# Altium PCB PWM_change.PcbDoc
Units mil, origin at the board's own origin, x right, y up, seen from the top; angles counter-clockwise.
Board outline 3937.01 x 3937.01 mil, 2 copper layers (Top Layer, Bottom Layer); 54 components, 43 nets, 159 pads, 8 vias.
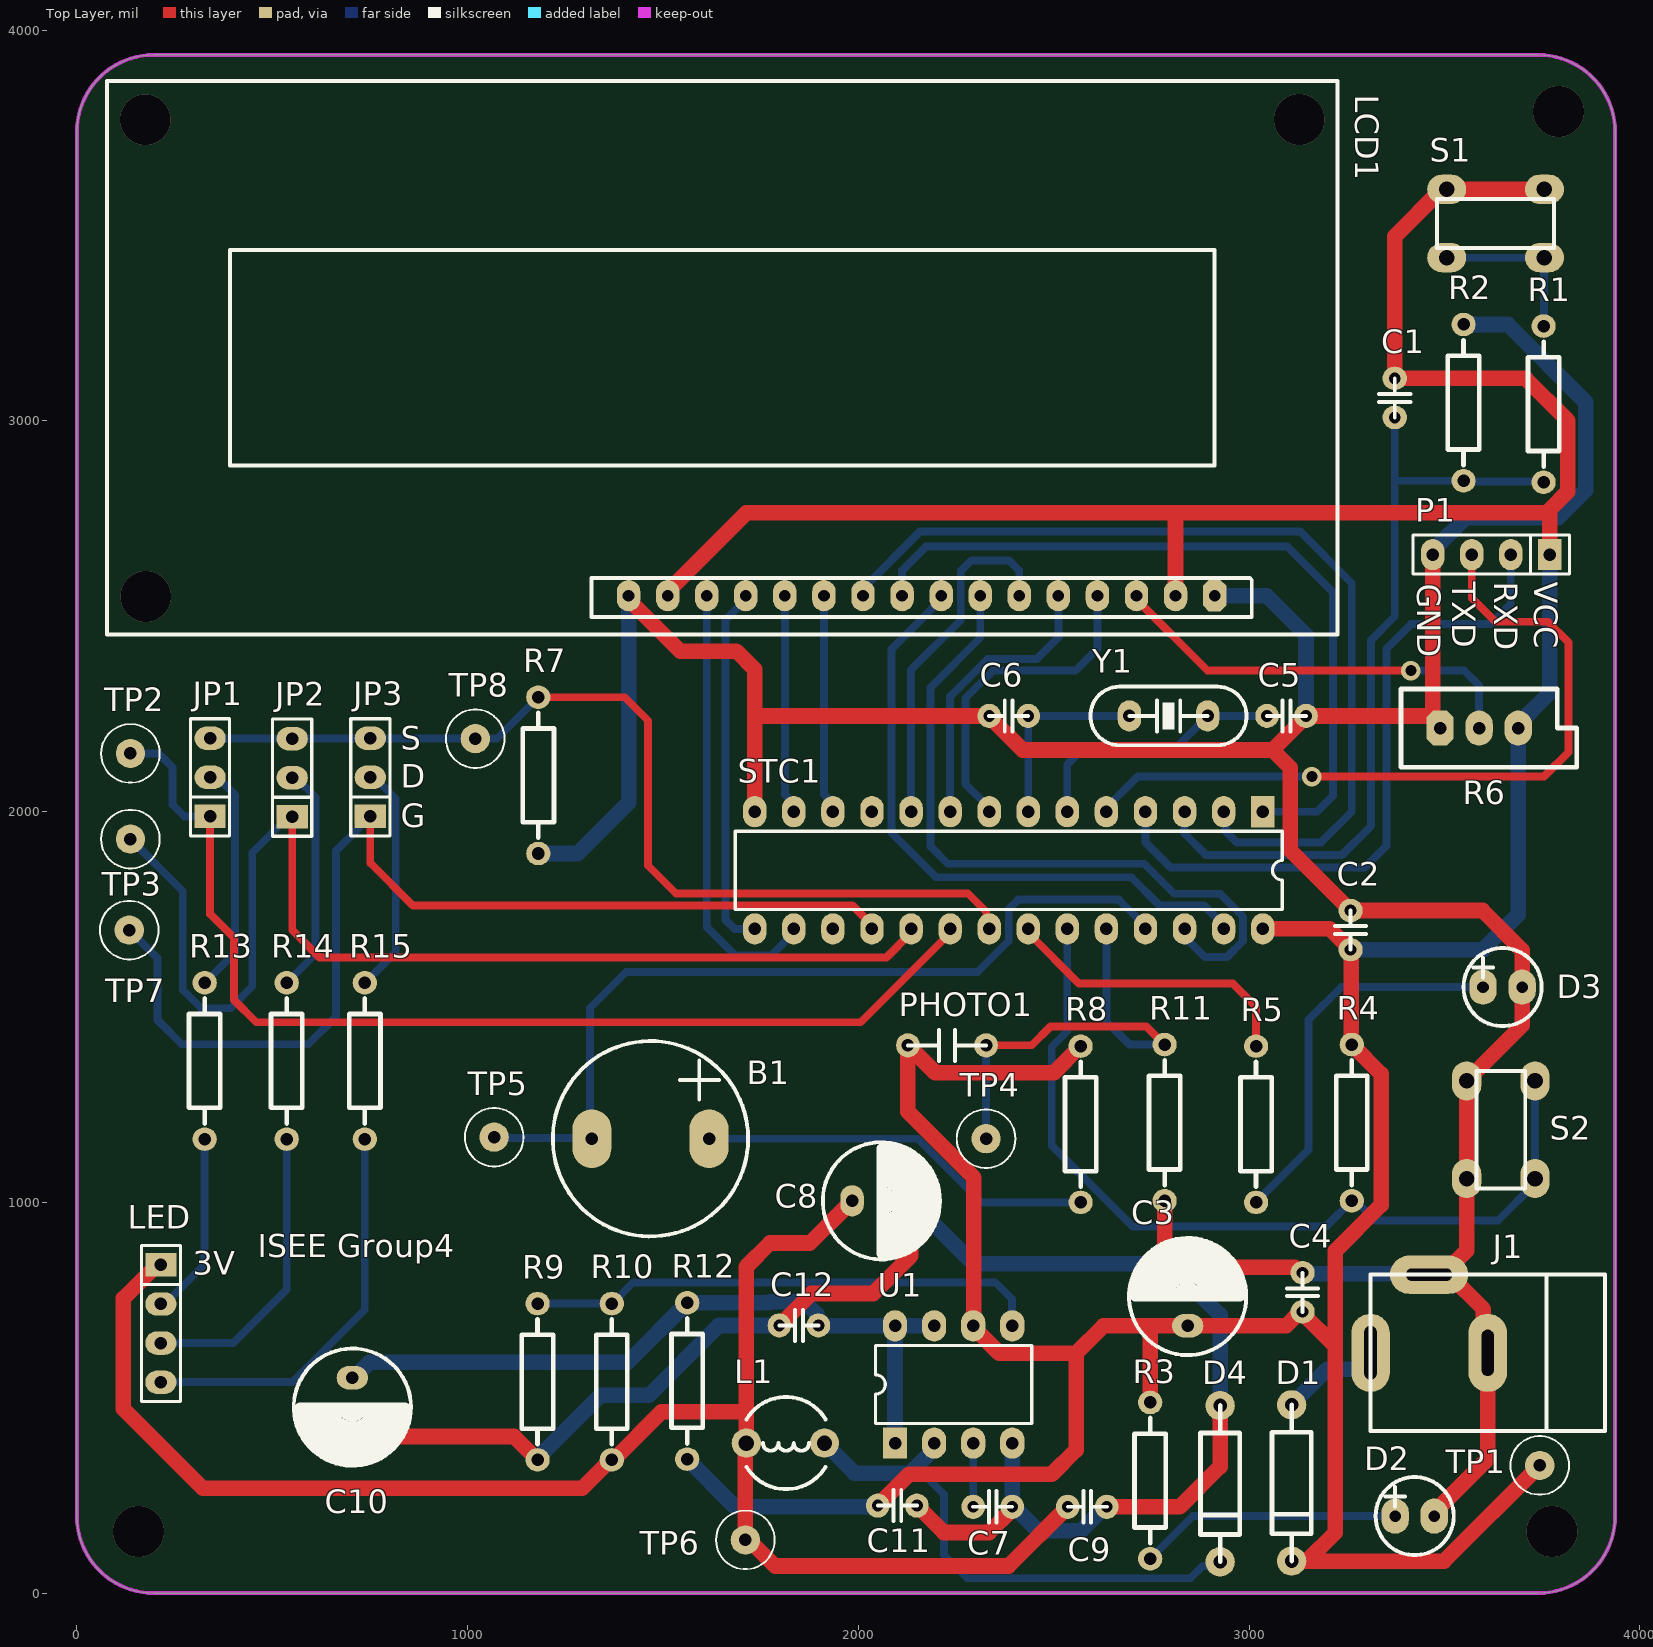
[diagram p0: Top Layer view]
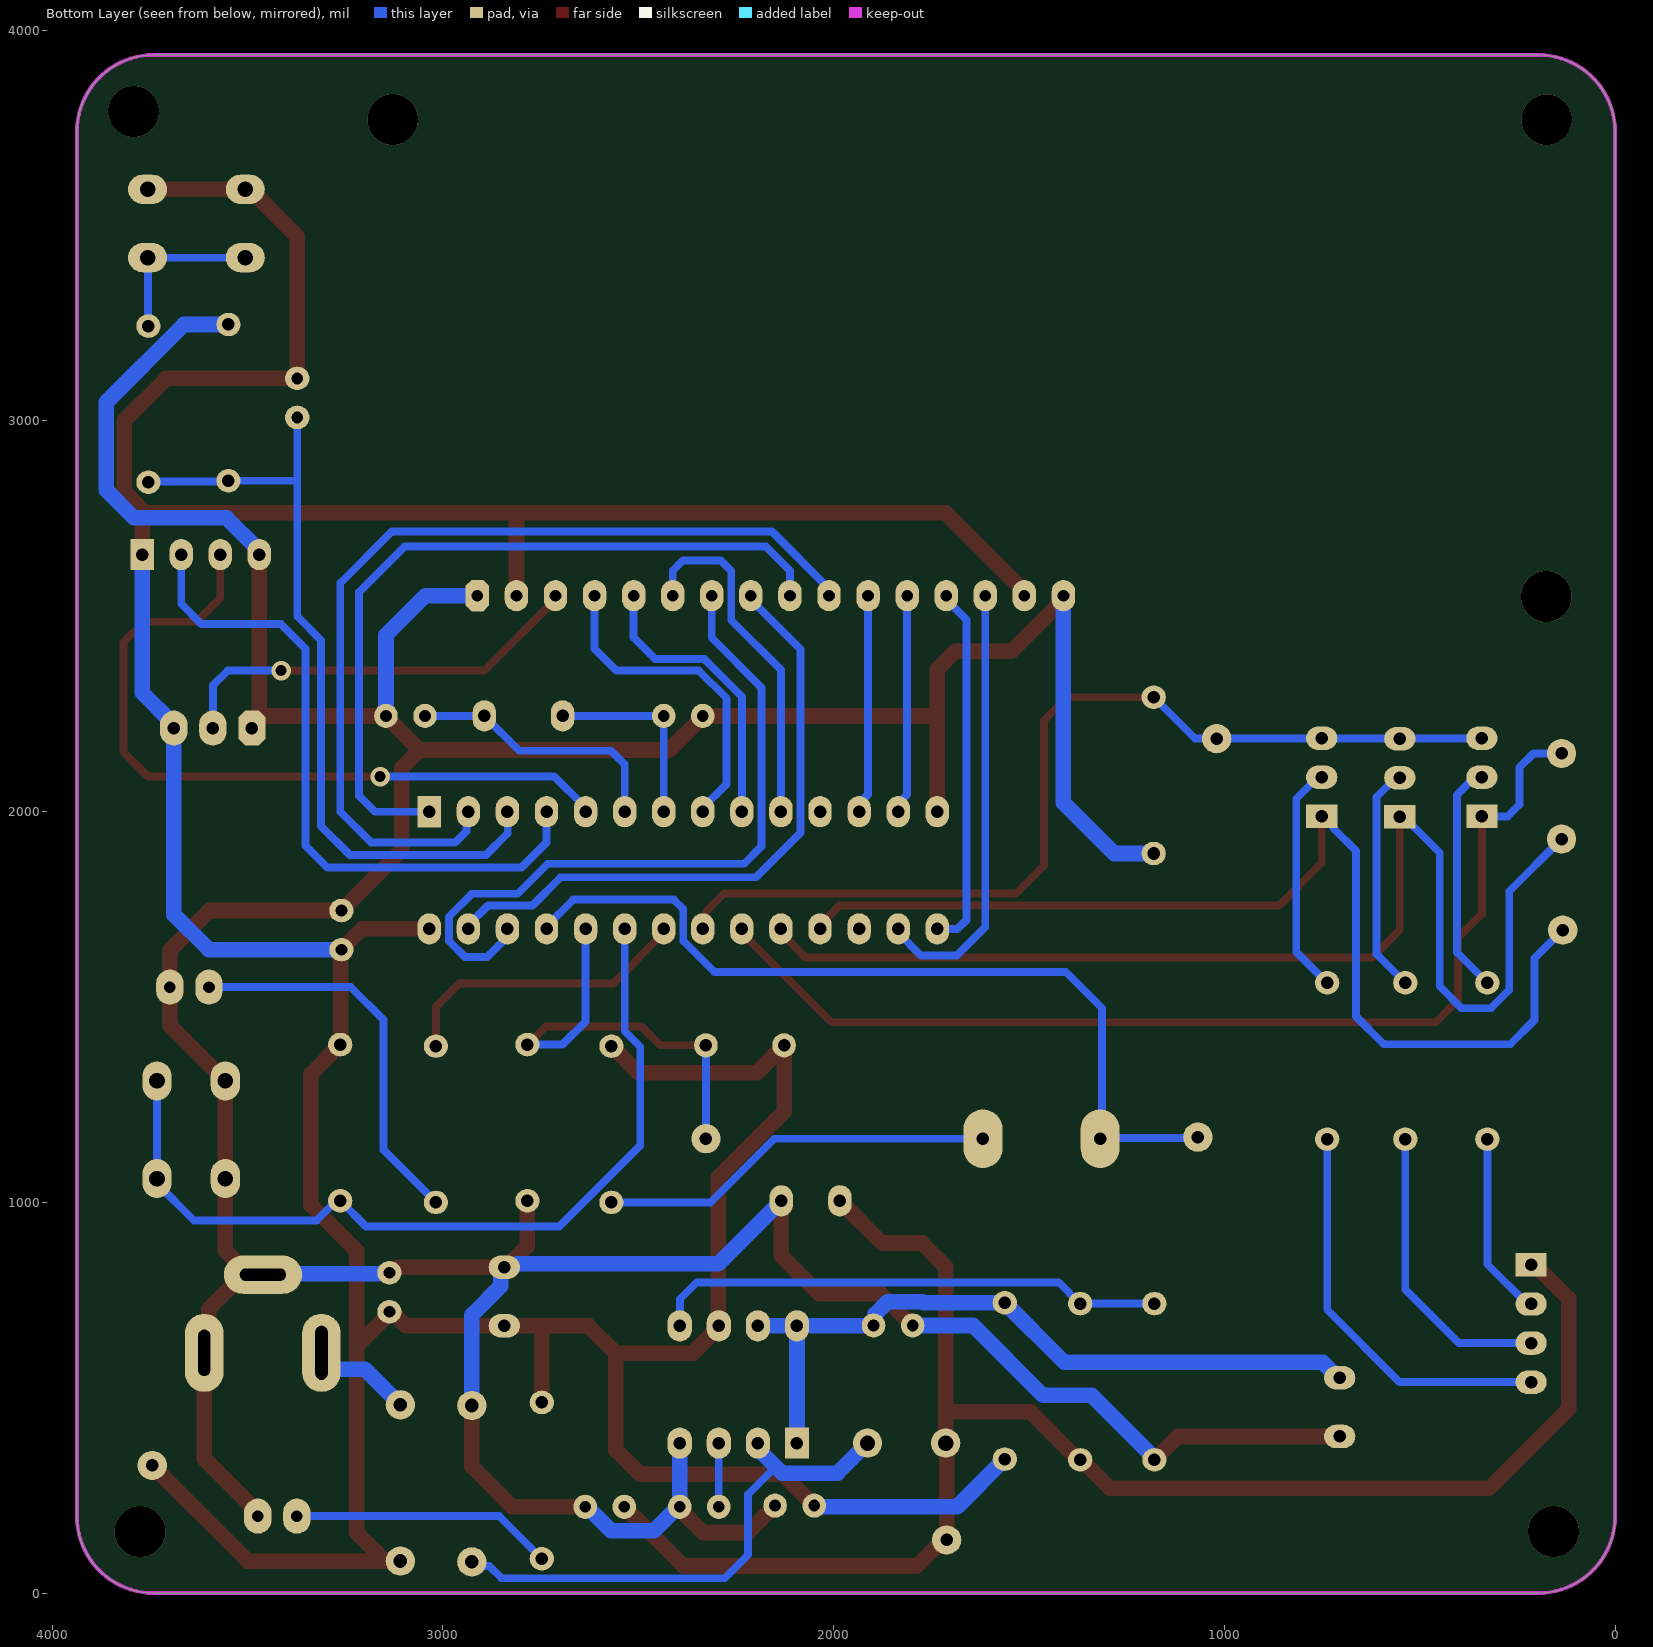
[diagram p1: Bottom Layer view, seen from below]

## Layer stack, top to bottom
Top Solder: solder mask 0.4, Solder Resist, Dk 3.5
Top Layer: signal copper 1.4
Dielectric 1: dielectric 12.6, FR-4, Dk 4.8
Bottom Layer: signal copper 1.4
Bottom Solder: solder mask 0.4, Solder Resist, Dk 3.5

## Board outline
0,196.85 ccw(c196.85,196.85) 196.85,0 3740.16,0 ccw(c3740.16,196.85) 3937.01,196.85 3937.01,3740.16 ccw(c3740.16,3740.16) 3740.16,3937.01 196.85,3937.01 ccw(c196.85,3740.16) 0,3740.16

## Design rules (kind name [scope] priority, off if disabled: settings)
Clearance [All] p1: gap=10 ignorepadtopadclearanceinfootprint=FALSE except(0: Arc-Hole Track-Hole SMDPad-Hole THPad-Hole Via-Hole Fill-Hole Poly-Hole Region-Hole Text-Hole)
PolygonConnect [All] p1: connectstyle=Relief reliefconductorwidth=10 reliefentries=4 polygonreliefangle="90 Angle" airgapwidth=10
RoutingVias [All] p1: holewidth=28 width=50 viastyle="Through Hole" minholewidth=28 minwidth=50 maxholewidth=28 maxwidth=50
SolderMaskExpansion [All] p1: expansion=4 istentingtop=FALSE
Width [All] p1: maxlimit=40 minlimit=20 preferedwidth=40 minimp=50.000000 maximp=50.000000 favimp=50.000000
30 further rules are at their usual default settings.

## Components (designator, comment, footprint, x,y, rotation, side; value= is the part's Value field where it differs from the comment)
B1 "BELL" BELL 1468,1163 r0 top
C1 "10uF" C1 3373,3109 r270 top
C2 "0.1uF" C1 3260,1747 r270 top value=0.1u
C3 "470uF" RB.15/.3 2843,684 r90 top
C4 "104u" C1 3137,820 r270 top value=104
C5 "47pF" C1 3046,2245 r0 top value=30p
C6 "47pF" C1 2434.84,2245 r180 top value=30p
C7 "471" C1 2394,221 r180 top
C8 "330uF" RB.15/.3 1984,1004 r0 top
C9 "104" C1 2536,221 r0 top
C10 "47uF" RB.15/.3 705,551 r270 top
C11 "104" C1 2050,224 r0 top
C12 "104" C1 1898,685 r180 top
D1 "1N4007" DIODE0.4 3109,482 r270 top
D2 "LED1" LED--5 3374,197 r0 top
D3 "LED1" LED--5 3599,1551 r0 top
D4 "1N5819" DIODE0.4 2926,480 r270 top
J1 "电源插座5.4mm" DC-005 3311,615 r0 top
JP1 "RED" SIP3 341,1988 r90 top
JP2 "GREEN" SIP3 551,1987 r90 top
JP3 "BLUE" SIP3 751,1988 r90 top
L1 "220uH" L-4*15 1815,384 r180 top
LCD1 "LCD1602" lcd1602 1652.16,3161.66 r180 top
LED "LED" SIP4 215,840 r270 top (schematic designator JP4)
P1 "HEADER 4" SIP4 3770,2658 r180 top
PHOTO1 "PHOTO" C2 2327,1402 r180 top
R1 "1.5K" AXIAL0.4 3754,3243 r270 top
R2 "10K" AXIAL0.4 3549,2847 r90 top
R3 "1K" AXIAL0.4 2747,88 r90 top value=10K
R4 "10K" AXIAL0.4 3263,1004 r90 top value=1K
R5 "1K" AXIAL0.4 3018,1000 r90 top value=10K
R6 "10K" VR5 3489,2214 r0 top
R7 "0.5R" AXIAL0.4 1181,1893 r90 top
R8 "100R" AXIAL0.4 2569,1000 r90 top
R9 "2K" AXIAL0.4 1179,341 r90 top
R10 "2.8K" AXIAL0.4 1369,341 r90 top
R11 "47K" AXIAL0.4 2784,1004 r90 top
R12 "0.51R" AXIAL0.4 1562,343 r90 top
R13 "100R" AXIAL0.4 327,1562 r270 top
R14 "100R" AXIAL0.4 537,1562 r270 top
R15 "100R" AXIAL0.4 737,1562 r270 top
S1 "SW-PB" SWPB1 3756,3418 r0 top
S2 "SW-PB" SWPB1 3732,1311 r90 top
STC1 "STC12C5616AD" DIP28S 3035,2000 r270 top
TP1 "TP-1" TP-1-1 3744.09,326.77 r0 top
TP2 "TP-1" TP-1-1 137,2149 r0 top
TP3 "TP-1" TP-1-1 137,1930 r0 top
TP4 "TP-1" TP-1-1 2327,1163 r0 top
TP5 "TP-1" TP-1-1 1068,1167 r0 top
TP6 "TP-1" TP-1-1 1711,136 r0 top
TP7 "TP-1" TP-1-1 134,1697 r0 top
TP8 "TP-1" TP-1-1 1019.68,2187 r0 top
U1 "MC34063" DIP8 2094,384 r90 top
Y1 "11.0592MHz" CY2 2694,2245 r0 top

## Footprints (in the part's own frame and the unit in brackets; to place one, negate y for a bottom-side part, rotate by r counter-clockwise, add the part's x,y. Pads: shape width x height; smd on the part's side, far side on the other; paste and mask are expansions set on the pad)
AXIAL0.4 [mil]
  oval 60x62 hole 32: 1(0,0) 2(400,0)
  silkscreen extent 40,-40 360,40, body extent -11,-50 413,49, height 128
BELL [mil]
  oval 100x150 hole 32: 1(150,0) 2(-150,0)
  silkscreen extent -250,-250 250,250
C1 [mil]
  oval 60x62 hole 30: 1(0,0) 2(100,0)
  silkscreen extent 0,-40 100,40
C2 [mil]
  oval 60x62 hole 32: 1(0,0) 2(200,0)
  silkscreen extent 0,-40 200,40
CY2 [mil]
  oval 60x80 hole 32: 1(0,0) 2(200,0)
  silkscreen extent -100,-75 300,75
DC-005 [mm]
  oval 2.5x5.08 hole 0.8 slot 3.5 at 90 deg: 1(0,0)
  oval 2.5x5.08 hole 0.8 slot 3 at 90 deg: 2(7.62,0)
  oval 5.08x2.5 hole 0.8 slot 3 at 0 deg: 3(3.81,5.08)
  silkscreen extent 0,-5.08 15.24,5.08, body extent 0.12,-4.4 15.32,5, height 11
DIODE0.4 [mil]
  round 75 hole 35: A(0,0) K(400,0)
  silkscreen extent 0,-50 400,50, body extent -18,-50 418,52, height 130
DIP8 [mil]
  rect 80x62 hole 32: 1(0,0)
  oval 80x62 hole 32: 2(0,-100) 3(0,-200) 4(0,-300) 5(300,-300) 6(300,-200) 7(300,-100) 8(300,0)
  silkscreen extent 50,-350 250,50
DIP28S [mil]
  rect 80x60 hole 32: 1(0,0)
  oval 80x60 hole 32: 2(0,-100) 3(0,-200) 4(0,-300) 5(0,-400) 6(0,-500) 7(0,-600) 8(0,-700) 9(0,-800) 10(0,-900) 11(0,-1000) 12(0,-1100) 13(0,-1200) 14(0,-1300) 15(300,-1300) 16(300,-1200) 17(300,-1100) 18(300,-1000) 19(300,-900) 20(300,-800) 21(300,-700) 22(300,-600) 23(300,-500) 24(300,-400) 25(300,-300) 26(300,-200) 27(300,-100) 28(300,0)
  silkscreen extent 50,-1350 250,50
L-4*15 [mm]
  round 1.905 hole 1: 1(-2.5,0) 2(2.58,0)
  silkscreen extent -2.57,-3 2.57,3
lcd1602 [mil]
  oct 60x80 hole 30: 1(-1259.84,608.66)
  oval 60x80 hole 30: 2(-1159.84,608.66) 3(-1059.84,608.66) 4(-959.84,608.66) 5(-859.84,608.66) 6(-759.84,608.66) 7(-659.84,608.66) 8(-559.84,608.66) 9(-459.84,608.66) 10(-359.84,608.66) 11(-259.84,608.66) 12(-159.84,608.66) 13(-59.84,608.66) 14(40.16,608.66) 15(140.16,608.66) 16(240.16,608.66)
  silkscreen extent -1575,-709 1575,709
LED--5 [mil]
  oval 70x90 hole 30: A(0,0) K(100,0)
  silkscreen extent -50,-100 150,100
RB.15/.3 [mil]
  oval 60x80 hole 32: 1(0,0) 2(150,0)
  silkscreen extent -75,-150 225,150
SIP3 [mil]
  rect 60x80 hole 32: 1(0,0)
  oval 60x80 hole 32: 2(100,0) 3(200,0)
  silkscreen extent -50,-50 250,50, body extent -50,-50 250,50, height 336
SIP4 [mil]
  rect 60x80 hole 32: 1(0,0)
  oval 60x80 hole 32: 2(100,0) 3(200,0) 4(300,0)
  silkscreen extent -50,-50 350,50, body extent -50,-50 350,50, height 336
SWPB1 [mil]
  oval 100x75 hole 40: 1(-250,0) 1(0,0) 2(-250,175) 2(0,175)
  silkscreen extent -275,25 25,150
TP-1-1 [mil]
  round 75 hole 32: 1(0,0)
  silkscreen extent -75,-75 75,75
VR5 [mil]
  oct 70x90 hole 32: 1(0,0)
  oval 70x90 hole 32: 2(200,0) W(100,0)
  silkscreen extent -100,-100 350,100

## Part data
C1 C7 C9 C11 C12: library part CAP
C2 C4 C5 C6: library part Cap, "Capacitor", LatestRevisionDate=17-Jul-2002, LatestRevisionNote="Re-released for DXP Platform.", PackageReference=RAD-0.3, Published=8-Jun-2000, Publisher="Altium Limited"
C3: library part CD, "电解电容", =470u
C8 C10: library part ELECTRO2
D1: library part D1
D2 D3: "Typical RED GaAs LED", LatestRevisionDate=08-Jul-2005, LatestRevisionNote="Mech Layer 1 removed.", PackageReference=LED-1, Published=8-Jun-2000, Publisher="Altium Limited"
D4: library part DIODE
JP1 JP2 JP3: library part "HEADER 3"
L1: library part INDUCTOR
LED: library part "HEADER 4"
P1: "4 Pin Header"
R1 R2: library part RES2
R3 R4 R5: library part Res2, "Resistor", LatestRevisionDate=17-Jul-2002, LatestRevisionNote="Re-released for DXP Platform.", PackageReference=AXIAL-0.4, Published=8-Jun-2000, Publisher="Altium Limited"
R6: library part POT1
R7 R8 R9 R10 R11 R12 R13 R14 R15: library part RES1
STC1: library part STC12C5410-35C-PSOP28
Y1: library part XTAL, "Crystal Oscillator", LatestRevisionDate=17-Jul-2002, LatestRevisionNote="Re-released for DXP Platform.", PackageReference=R38, Published=8-Jun-2000, Publisher="Altium Limited"

## Via types
v1: diameter 130, hole 130, Top Layer to Bottom Layer, 6 vias
v2: diameter 50, hole 28, Top Layer to Bottom Layer, 2 vias

## Nets (pads, with @x,y where several pads share a name; then routed paths per layer and width w, separated by ;. In a path a pad name is that pad's centre, name@x,y a point inside that pad or via, vN(x,y) a via of type N, cw(c..) or ccw(c..) an arc to the next point about the centre after c; other vN are vias at no path point)
3V: C8.1 C9.1 L1.2 LED.1 R10.1 TP6.1 | length 4132.8
  Top Layer w40: LED.1 205,840 119,754 119,471.55 322.55,268 1293,268 1366,341 R10.1 1373.28,341 1496.28,464 1713.43,464 ; C8.1 1984,999.41 1974.76,990.17 1970.17,990.17 1876,896 1774,896 1713.43,835.43 1713.43,464 ; C9.1 2384.48,69.48 1786.99,69.48 1720.47,136 TP6.1 1711,381.57 L1.2 1713.43,464
BEEP: B1.2 STC1.25 TP5.1 | length 2205.1
  Bottom Layer w20: TP5.1 1070,1165 B1.2@1316,1165 ; B1.2 B1.2@1316,1165 ; STC1.25 2735,1707 2667,1775 2409,1775 2385,1751 2385,1669.29 2305.71,1590 1406,1590 1313,1497 1313,1168 B1.2@1316,1165
BLUE: JP3.2 R15.1 | length 588.6
  Bottom Layer w20: R15.1@737,1569 744,1569 816,1641 816,2033 761,2088 JP3.2
check: JP1.3 JP2.3 JP3.3 R7.2 STC1.21 TP8.1 | length 2523.2
  Top Layer w20: R7.2 1402,2293 1462,2233 1462,1862 1533,1791 2280,1791 2327.35,1743.65 2327.35,1707.65 STC1.21
  Bottom Layer w20: JP1.3 341.5,2187.5 550.5,2187.5 JP2.3 551.5,2187.5 750.5,2187.5 JP3.3 751.5,2187.5 951.5,2187.5 952,2187 1075,2187 R7.2
"E     P34": LCD1.6 STC1.10 | length 904.6
  Bottom Layer w20: STC1.10 2135,2363 2262,2490 2262,2616 2289,2643 2386,2643 2412,2617 LCD1.6
GND: C2.1 C3.2 C4.1 C5.2 C6.2 C7.1 C8.2 C9.2 C10.2 C11.2 C12.2 D2.K D3.K D4.A J1.2 J1.3 LCD1.1 LCD1.16 P1.4 R2.2 R6.1 R7.1 R9.1 R11.1 S2.2 STC1.14 U1.4 | length 13161.1
  Top Layer w40: C10.2 1119,401 R9.1 ; LCD1.16 1412,2543 1544,2411 1688,2411 1735,2364 1735,2242 ; STC1.14 1735,2242 ; C12.2 1880,767 2038,767 2134,863 C8.2 ; C11.2 2219,155 2334.41,155 2394,214.59 C7.1 ; C9.2 2823,221 2926,324 D4.A ; R11.1 2784,888.41 2838.41,834 C3.2 3116.59,834 3130.59,820 C4.1 ; J1.3 J1.3@3495.98,815 ; P1.4 3470,2248.78 3489,2229.78 R6.1@3489,2218.22 ; D2.K 3474,207 3611,344 J1.2 3599.82,626.18 3599.82,726.97 3511.79,815 J1.3@3495.98,815 ; R6.1 R6.1@3489,2218.22 ; 1735,2242 1738,2245 C6.2 2334.84,2244 2420.84,2158 3060,2158 ; 3060,2158 3106,2112 3106,1901 C2.1 3597.5,1747 3699,1645.5 D3.K 3699,1453 3576.2,1330.2 3573.17,1330.2 3557,1314.03 3557,1311 3557,1061 3557,876.02 J1.3@3495.98,815 ; 3060,2158 3146,2244 C5.2 3462.22,2245 R6.1@3489,2218.22
  Bottom Layer w40: R9.1 1179,345.41 1339.59,506 1464,506 1643,685 C12.2 ; R7.1 1282,1893 1412,2023 LCD1.16 ; C8.2 2134,999.41 2143.24,990.17 2147.83,990.17 2295.48,842.52 2810.34,842.52 2815.03,837.83 2839.17,837.83 C3.2 ; U1.4 C7.1 2398.41,221 2459.41,160 2570.59,160 2631.59,221 C9.2 ; C3.2@2845.23,836.23 2852.04,829.41 2852.04,785.76 2926,711.8 D4.A ; LCD1.1 3045,2553 3146,2452 C5.2 ; C4.1 3139.5,817.5 3458.5,817.5 J1.3 ; P1.4 3476.53,2664.53 3476.53,2674.53 3554,2752 3791,2752 3862,2823 3862,3048 3663,3247 R2.2
GREEN: JP2.2 R14.1 | length 586.4
  Bottom Layer w20: R14.1 611,1636 611,2037 561,2087 JP2.2
light_AD: PHOTO1.1 R11.2 STC1.24 TP4.1 | length 1145.4
  Top Layer w20: PHOTO1.1 2444.09,1402 2492.09,1450 2737,1450 2783,1404 R11.2
  Bottom Layer w20: TP4.1 PHOTO1.1 ; STC1.24 2635,1463 2694,1404 R11.2
NetB1_1: B1.1 R8.1 | length 1018.5
  Bottom Layer w20: B1.1 2152,1163 2315,1000 R8.1
NetC1_2: C1.2 R1.2 R2.1 STC1.3 | length 2042.5
  Bottom Layer w20: STC1.3 2834.43,1999.43 2834.43,1944.57 2890,1889 3238,1889 3312,1963 3312,2439 3373,2500 3373,2843 ; C1.2 3373,2843 ; R1.2 3752,2845 3551,2845 R2.1 3377,2847 3373,2843
NetC5_1: C5.1 STC1.6 Y1.2 | length 683.4
  Bottom Layer w20: STC1.6 2535,2121 2570,2156 2805,2156 Y1.2 C5.1
NetC6_1: C6.1 STC1.7 Y1.1 | length 504.2
  Bottom Layer w20: STC1.7 2434.92,2000.08 2434.92,2244.92 C6.1 Y1.1
NetC7_2: C7.2 U1.3 | length 163
  Bottom Layer w20: C7.2 U1.3
NetC10_1: C10.1 C12.1 R12.2 U1.1 U1.7 U1.8 | length 1910.3
  Bottom Layer w20: C12.1 C12.1@1898.5,684.5 ; U1.8@2093.5,684.5 U1.8
  Bottom Layer w40: C10.1 709.59,551 725,566.41 725,567.12 748.43,590.55 1409.55,590.55 R12.2 1770.15,743 1773.15,746 1861.57,746 1894.17,713.4 1894.17,688.83 C12.1 ; C12.1@1898.5,684.5 U1.8@2093.5,684.5 ; U1.1 U1.8 U1.7
NetD1_1: D1.A J1.1 | length 239.6
  Bottom Layer w40: D1.A 3199.79,572.79 J1.1@3311,572.79
NetD2_1: D2.A R3.1 | length 672.1
  Bottom Layer w20: R3.1 2856,197 D2.A
NetD3_1: D3.A R5.1 | length 1004.3
  Bottom Layer w20: R5.1 3152,1134 3152,1467 3236,1551 D3.A
NetD4_K: D4.K L1.1 U1.2 | length 1357.9
  Bottom Layer w20: 2150,325.05 2150,322.06 2219,253.06 2219,98 2279,38 2850,38 2881.48,69.48 2915.48,69.48 D4.K
  Bottom Layer w40: L1.1 1990.34,307.09 2132.04,307.09 2150,325.05 2194,369.05 U1.2
NetJP4_2: LED.2 R13.2 | length 474.2
  Bottom Layer w20: LED.2 225,740 327,842 R13.2
NetJP4_3: LED.3 R14.2 | length 763.7
  Bottom Layer w20: LED.3 399.84,640 537,777.16 R14.2
NetJP4_4: LED.4 R15.2 | length 1035.5
  Bottom Layer w20: LED.4 551.81,540 737,725.19 R15.2
NetLCD1_3: LCD1.3 R6.W | length 1087.1
  Top Layer w20: LCD1.3 2712,2543 2894,2361 v2(3414.43,2361)
  Bottom Layer w20: v2(3414.43,2361) 3551,2361 3589,2323 R6.W
NetR1_1: R1.1 S1.1 | length 425.8
  Bottom Layer w20: S1.1@3506,3418 3756,3418 3755,3417 3755,3244 R1.1
NetR4_1: R4.1 S2.1 STC1.23 | length 2243.4
  Bottom Layer w20: STC1.23 2535,1438 2495,1398 2495,1145.71 2702.45,938.26 3197.26,938.26 R4.1 3273,1004 3323,954 3637.5,954 3732,1048.5 3732,1061 S2.1@3732,1311
NetR5_2: R5.2 STC1.22 | length 772.3
  Top Layer w20: STC1.22 2435,1690 2565,1560 2959,1560 3018,1501 R5.2
NetR9_2: R9.2 R10.2 U1.5 | length 1323.4
  Bottom Layer w20: R9.2 1370,741 1424.28,795.28 2350.72,795.28 2393,753 2393,685 U1.5
P10: JP3.1 STC1.18 TP7.1 | length 2805.1
  Top Layer w20: JP3.1 751,1869 860,1760 1985,1760 2035,1710 STC1.18
  Bottom Layer w20: TP7.1 206.26,1624.74 206.26,1466.74 268,1405 592,1405 663,1476 663,1900 721,1958 721,1968 741,1988 JP3.1
P11: JP2.1 STC1.19 TP3.1 | length 3083.4
  Top Layer w20: JP2.1 551,1697 621,1627 2072,1627 2135,1690 STC1.19
  Bottom Layer w20: TP3.1 271,1796 271,1544 318,1497 393,1497 449,1553 449,1895 541,1987 JP2.1
P12: JP1.1 STC1.20 TP2.1 | length 2783.1
  Top Layer w20: JP1.1 341,1738 402,1677 402,1518 459,1461 2006,1461 2235,1690 STC1.20
  Bottom Layer w20: TP2.1 209,2149 245,2113 245,2018 275,1988 JP1.1
P20: LCD1.7 STC1.26 | length 1859.3
  Top Layer w20: LCD1.7@2312,2543 LCD1.7 ; STC1.26@2835,1690 STC1.26
  Bottom Layer w20: LCD1.7 2312,2445 2185,2318 2185,1911 2229,1867 2732,1867 2809,1790 2925.71,1790 2985,1730.71 2985,1669.29 2943.71,1628 2887,1628 2835,1680 STC1.26
P21: LCD1.8 STC1.27 | length 1617.4
  Top Layer w20: LCD1.8@2212,2543 LCD1.8 ; STC1.27 STC1.27@2935,1710
  Bottom Layer w20: LCD1.8@2212,2543 2085,2416 2085,1946 2199,1832 2699,1832 2771,1760 2885,1760 STC1.27@2935,1710
P22: LCD1.9 STC1.1 | length 1958.7
  Bottom Layer w20: LCD1.9 2112,2617 2173.48,2678.48 3098.52,2678.48 3215,2562 3215,2041 3174,2000 STC1.1
P23: LCD1.10 STC1.2 | length 2389
  Bottom Layer w20: LCD1.10 2012,2571 2158,2717 3131,2717 3263,2585 3263,2000 3184,1921 2969,1921 2939.93,1950.07 2939.93,1995.07 STC1.2
P24: LCD1.11 STC1.12 | length 562.5
  Bottom Layer w20: LCD1.11 1912,2043.82 1935,2020.82 STC1.12
P25: LCD1.12 STC1.13 | length 562.5
  Bottom Layer w20: LCD1.12 1812,2043.82 1835,2020.82 STC1.13
P26: LCD1.13 STC1.15 | length 936.1
  Bottom Layer w20: LCD1.13 1712,2543 1660,2491 1660,1723 1683,1700 STC1.15
P27: LCD1.14 STC1.16 | length 1135.3
  Bottom Layer w20: LCD1.14 1612,1705 1685,1632 1777,1632 1835,1690 STC1.16
RED: JP1.2 R13.1 | length 595.8
  Bottom Layer w20: R13.1 405,1640 405,2042.68 359.68,2088 JP1.2
"RS  P32": LCD1.4 STC1.8 | length 841.7
  Bottom Layer w20: STC1.8 2335,2010 2274,2071 2274,2290 2345,2361 2555.72,2361 2612,2417.28 LCD1.4
"RW P33": LCD1.5 STC1.9 | length 741.5
  Bottom Layer w20: STC1.9 2235,2295 2331,2391 2457,2391 2512,2446 LCD1.5
"RXD P30": P1.2 STC1.4 | length 1741.7
  Bottom Layer w20: STC1.4 2735,1921 2799,1857 3296,1857 3351.72,1912.72 3351.72,2417.28 3414.43,2480 3618,2480 3670,2532 P1.2
"TXD P31": P1.3 STC1.5 | length 1948.5
  Top Layer w20: STC1.5 STC1.5@2635,2010 ; v2(3161,2090) 3755,2090 3818,2153 3818,2433 3765,2486 3631,2486 3570,2547 P1.3
  Bottom Layer w20: STC1.5@2635,2010 2715,2090 v2(3161,2090)
  Bottom Layer w40: STC1.5 STC1.5@2635,2010
VDD: C1.1 C2.2 C3.1 C4.2 C11.1 D1.K LCD1.2 LCD1.15 P1.1 PHOTO1.2 R3.2 R4.2 R6.2 R8.2 R12.1 S1.2 STC1.28 TP1.1 U1.6 | length 12170.3
  Top Layer w40: LCD1.15 1512,2563 1714,2765 3761.85,2765 3770,2773.15 ; C11.1 2130,304 2495,304 2557.36,366.36 2557.36,614 ; R8.2 2501,1332 2197,1332 PHOTO1.2 2127,1232 2295.5,1063.5 2295.5,685.5 U1.6 2294,680.95 2360.95,614 2557.36,614 ; R3.2 2747,684 ; LCD1.2 2812,2764 ; STC1.28 3207,1700 C2.2 3261.5,1645.5 3261.5,1405.5 R4.2 3338,1329 3338,993.15 3221,876.15 3221,632 ; D1.K 3148,82 ; TP1.1 3499.32,82 3148,82 ; S1.2@3756,3593 3506,3593 3493.5,3593 3373,3472.5 C1.1 3708,3109 3816,3001 3816,2819.15 3770,2773.15 ; P1.1 3770,2773.15 ; 2557.36,614 2627.36,684 2747,684 ; 2747,684 C3.1 3094.59,684 3130.59,720 C4.2 3137,716 3221,632 ; 3148,82 3221,155 3221,632
  Bottom Layer w40: R12.1 1684,221 2047,221 C11.1 ; C2.2 3599,1647 3689,1737 R6.2 3689,2224 3770,2305 P1.1
pads on no net: STC1.11 STC1.17
copper on no net:
  other v1: 157.48,157.48 3775.59,157.48 176,2551 175,3771 3128.84,3771.56 3792,3792

## Keep-outs
Keep-Out Layer:
  the board outline again, w10

## Silkscreen, mask and mechanical layers (free items; w line width, h text height)
Top Overlay:
  text "TXD" at 3520,2588 h60 r270
  text "RXD" at 3628,2588 h60 r270
  text "VCC" at 3730,2588 h60 r270
  text "GND" at 3430,2583 h60 r270
  text "S" at 828.9,2159 h60
  text "D" at 828.9,2061.18 h60
  text "G" at 828.9,1960 h60
  text "ISEE Group4" at 462.76,860.1 h59.06
  text "3V" at 297,815 h60